# EAGLE board PIR_Shield (EAGLE 7.4.0)
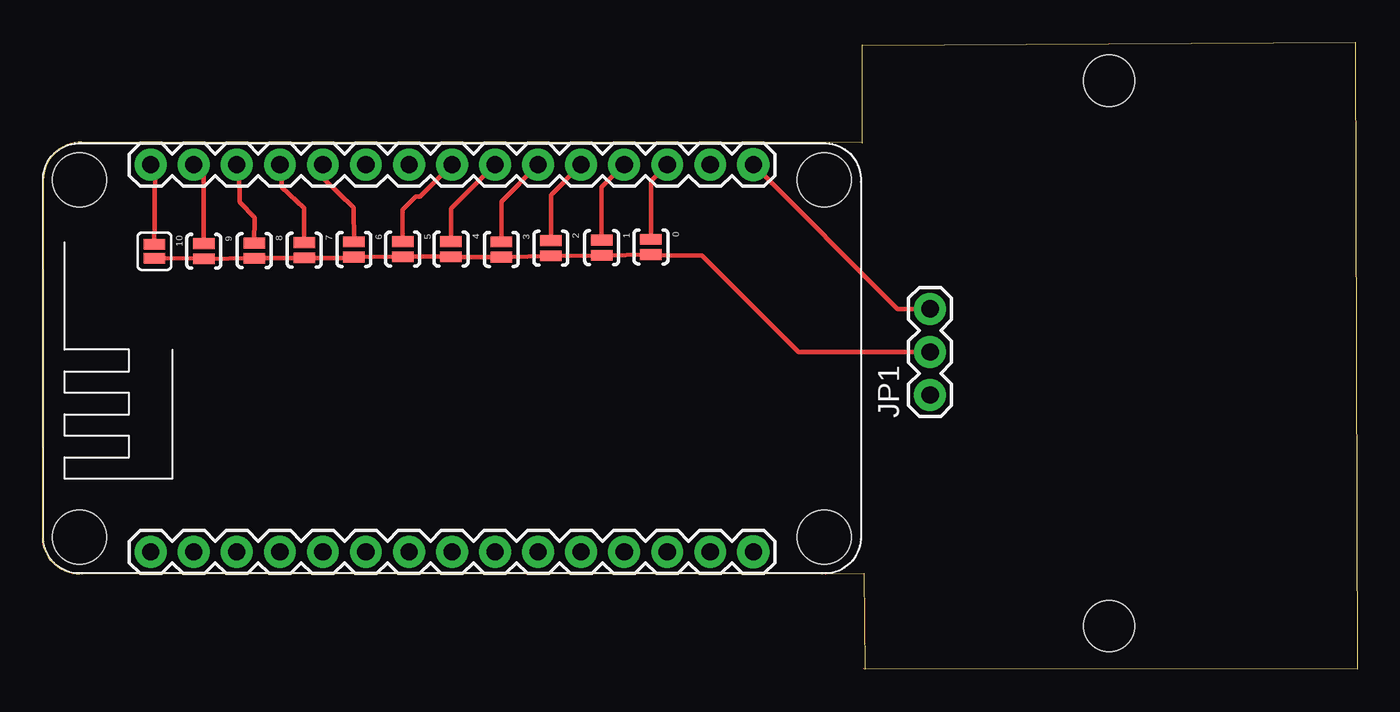
[diagram p0: board, top side]
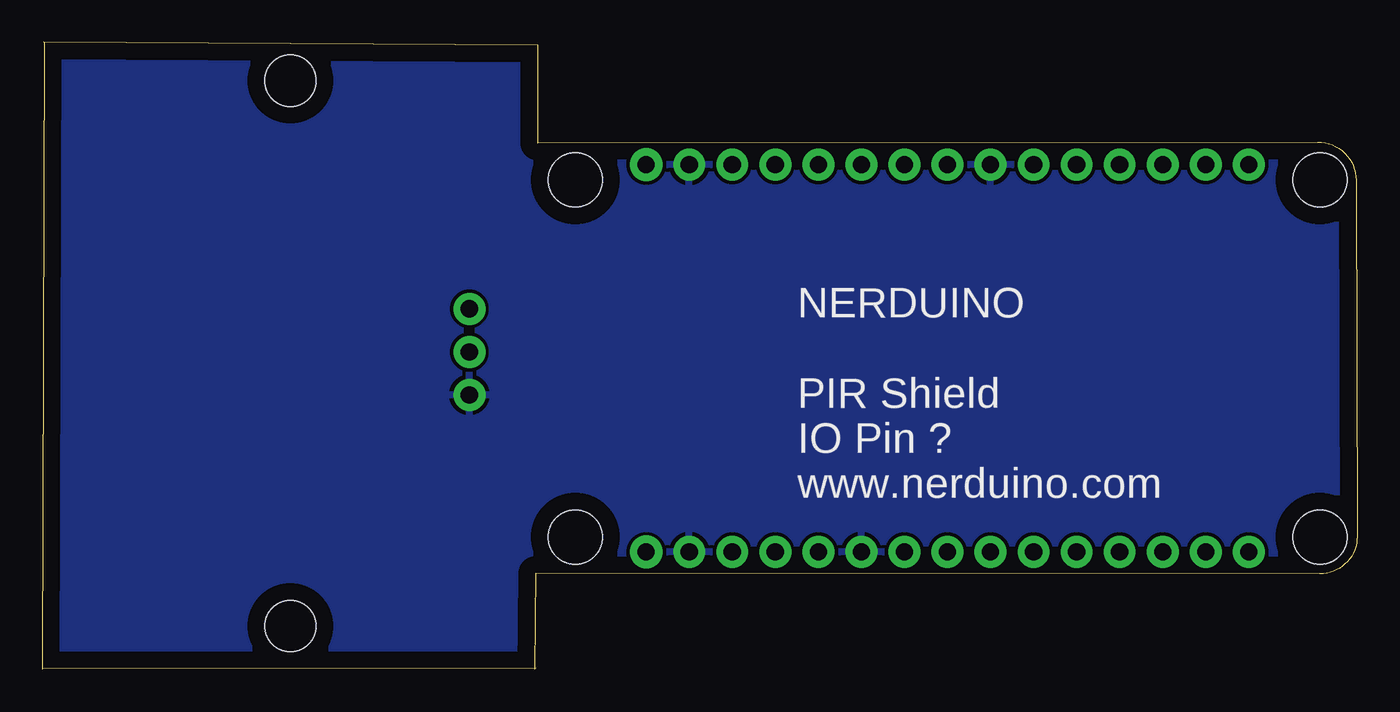
[diagram p1: board, bottom side, seen from below]

Size 77.59 x 37.01 mm. Coordinates in mm from the lower left corner, seen from the top.
Outline: 48.48,5.66 2.2,5.63 arc-90 0,7.84 0.06,28.87 arc-90 2.33,31.13 48.36,31.08
Outline: 77.49,37.01 77.58,0.01
Outline: 48.48,5.66 48.53,0
Outline: 48.37,36.88 48.36,31.07
Outline: 48.45,0.06 77.59,0.03
Outline: 48.36,36.85 77.5,37.01
Copper layers (1*16): Top 0.035mm / dielectric 1.5mm / Bottom 0.035mm
Design rules "default": minimum track width 10mil, minimum drill 24mil, track to track 8mil, track to pad 8mil, pad to pad 8mil, via to via 8mil, smd to smd 8mil, copper to edge 40mil, drill to drill 8mil, minimum pad ring 10mil, minimum via ring 8mil, stop-mask expansion 4mil, vias tented up to drill 0mil, thermal gap 10mil
Holes 3 mm at 62.94,34.74 62.94,2.54

## Footprints (pad centres in the part's own frame; a part is rotated, then mirrored left to right if it is on the bottom)
SJ_2S-NO = smd 0.635 x 1.27: 1 -0.45,0; 2 0.45,0
SJ_2S = smd 0.635 x 1.27: 1 -0.412,0; 2 0.412,0
1X03 = drill 1.016 pad 1.88: 1 0,0; 2 2.54,0; 3 5.08,0
NERDUINO_STACK = drill 1.016 pad 1.88: 1 -17.78,-5.08; 2 -15.24,-5.08; 3 -12.7,-5.08; 4 -10.16,-5.08; 5 -7.62,-5.08; 6 -5.08,-5.08; 7 -2.54,-5.08; 8 0,-5.08; 9 2.54,-5.08; 10 5.08,-5.08; 11 7.62,-5.08; 12 10.16,-5.08; 13 12.7,-5.08; 14 15.24,-5.08; 17 15.24,17.78; 18 12.7,17.78; 19 10.16,17.78; 20 7.62,17.78; 21 5.08,17.78; 22 2.54,17.78; 23 0,17.78; 24 -2.54,17.78; 25 -5.08,17.78; 26 -7.62,17.78; 27 -10.16,17.78; 28 -12.7,17.78; 29 -15.24,17.78; 30 -17.78,17.78 | drill 1 pad 1.93: 15 17.78,-5.08; 16 17.78,17.78 | hole 3.175: -21.971,16.891; -21.971,-4.191; 21.971,-4.191; 21.971,16.891

## Placement (x,y rotation side)
0  [SJ_2S-NO]  35.91,24.93 270 top
1  [SJ_2S-NO]  33,24.88 270 top
2  [SJ_2S-NO]  30,24.85 270 top
3  [SJ_2S-NO]  27.08,24.78 270 top
4  [SJ_2S-NO]  24.11,24.8 270 top
5  [SJ_2S-NO]  21.26,24.8 270 top
6  [SJ_2S-NO]  18.38,24.78 270 top
7  [SJ_2S-NO]  15.45,24.73 270 top
8  [SJ_2S-NO]  12.5,24.71 270 top
9  [SJ_2S-NO]  9.52,24.67 270 top
10  [SJ_2S]  6.61,24.67 270 top
JP1  [1X03]  52.38,16.19 90 top
U$1  NERDSHIELD  [NERDUINO_STACK]  24.17,12 0 top

## Library data of the parts
0 1-10 JP1 = SparkFun
U$1 = NerduinoShieldLib

## Nets
3.3V: JP1.3 U$1.16
GND: JP1.1 U$1.10 U$1.14 U$1.17 U$1.24
N$2: 0.2 1.2 2.2 3.2 4.2 5.2 6.2 7.2 8.2 9.2 10.2 JP1.2
N$3: 10.1 U$1.30
N$4: 9.1 U$1.29
N$5: 8.1 U$1.28
N$6: 7.1 U$1.27
N$7: 6.1 U$1.26
N$8: 5.1 U$1.23
N$9: 4.1 U$1.22
N$10: 3.1 U$1.21
N$11: 2.1 U$1.20
N$12: 1.1 U$1.19
N$13: 0.1 U$1.18

## Tracks (layer width: path | path; a pad name or v marks a point on that pad's centre or on a via)
3.3V
  Top 0.254: JP1.3 50.46,21.27 U$1.16
GND
  pour Bottom: 0.08,31.13 48.66,30.99 48.65,36.88 77.38,36.79 77.58,-0.05 48.59,0.04 48.4,5.68 -0.06,5.68
N$2
  Top 0.254: 10.2 9.31,24.24 9.2 9.49,24.2 8.2 12.77,24.27 7.2 18.5,24.28 18.26,24.25 18.46,24.34 18.41,24.37 18.37,24.3 6.2 5.2 21.29,24.37 4.2 24.14,24.32 3.2 27.29,24.34 2.2 30.13,24.4 1.2 | 1.2 0.2 36.89,24.42 38.93,24.42 44.62,18.73 JP1.2 | 1.2 32.76,24.3 32.96,24.31
N$3
  Top 0.254: 10.1 6.63,26.36 6.63,27.71 6.64,29.33 U$1.30
N$4
  Top 0.254: 9.1 9.52,29.15 U$1.29
N$5
  Top 0.254: 8.1 12.53,26.66 11.63,27.58 11.6,29.56 U$1.28
N$6
  Top 0.254: 7.1 15.45,27.22 14.13,28.46 14.14,29.72 U$1.27
N$7
  Top 0.254: 6.1 18.36,27.26 16.62,28.93 16.65,29.75 U$1.26
N$8
  Top 0.254: 5.1 21.26,27.14 22.02,27.9 22.29,27.9 U$1.23
N$9
  Top 0.254: 4.1 24.11,27.18 U$1.22
N$10
  Top 0.254: 3.1 27.08,27.61 U$1.21
N$11
  Top 0.254: 2.1 30,27.99 U$1.20
N$12
  Top 0.254: 1.1 33,28.45 U$1.19
N$13
  Top 0.254: 0.1 35.91,28.82 U$1.18

## Text on the board
_bsilk: NERDUINO / / PIR Shield / IO Pin ? / www.nerduino.com